# Altium PCB HLK-7621-ALL-KIT-V2.2.PcbDoc (part 1 of 2)
Units mm, origin at the board's own origin, x right, y up, seen from the top; angles counter-clockwise.
Board outline 140 x 100 mm, 2 copper layers (Top Layer, Bottom Layer); 118 components, 240 nets, 722 pads, 584 vias.
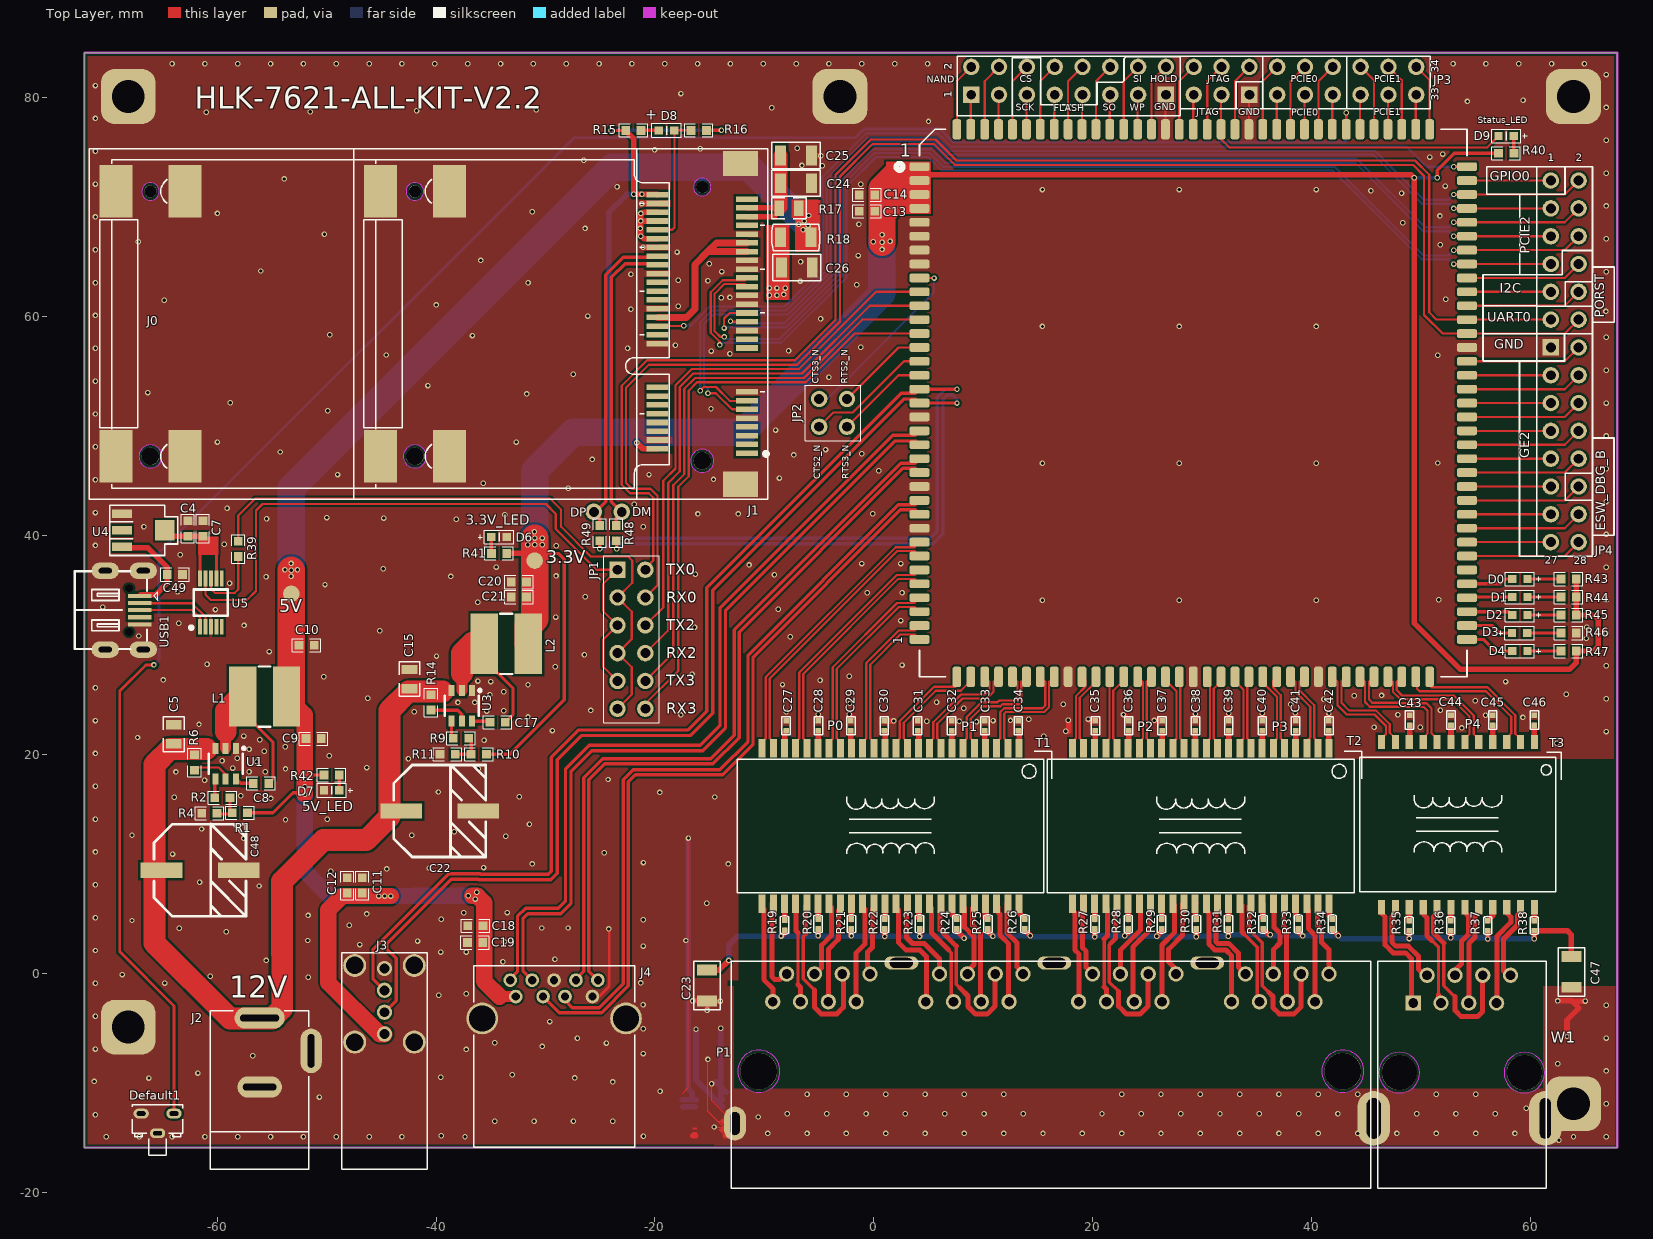
[diagram p0: Top Layer view]
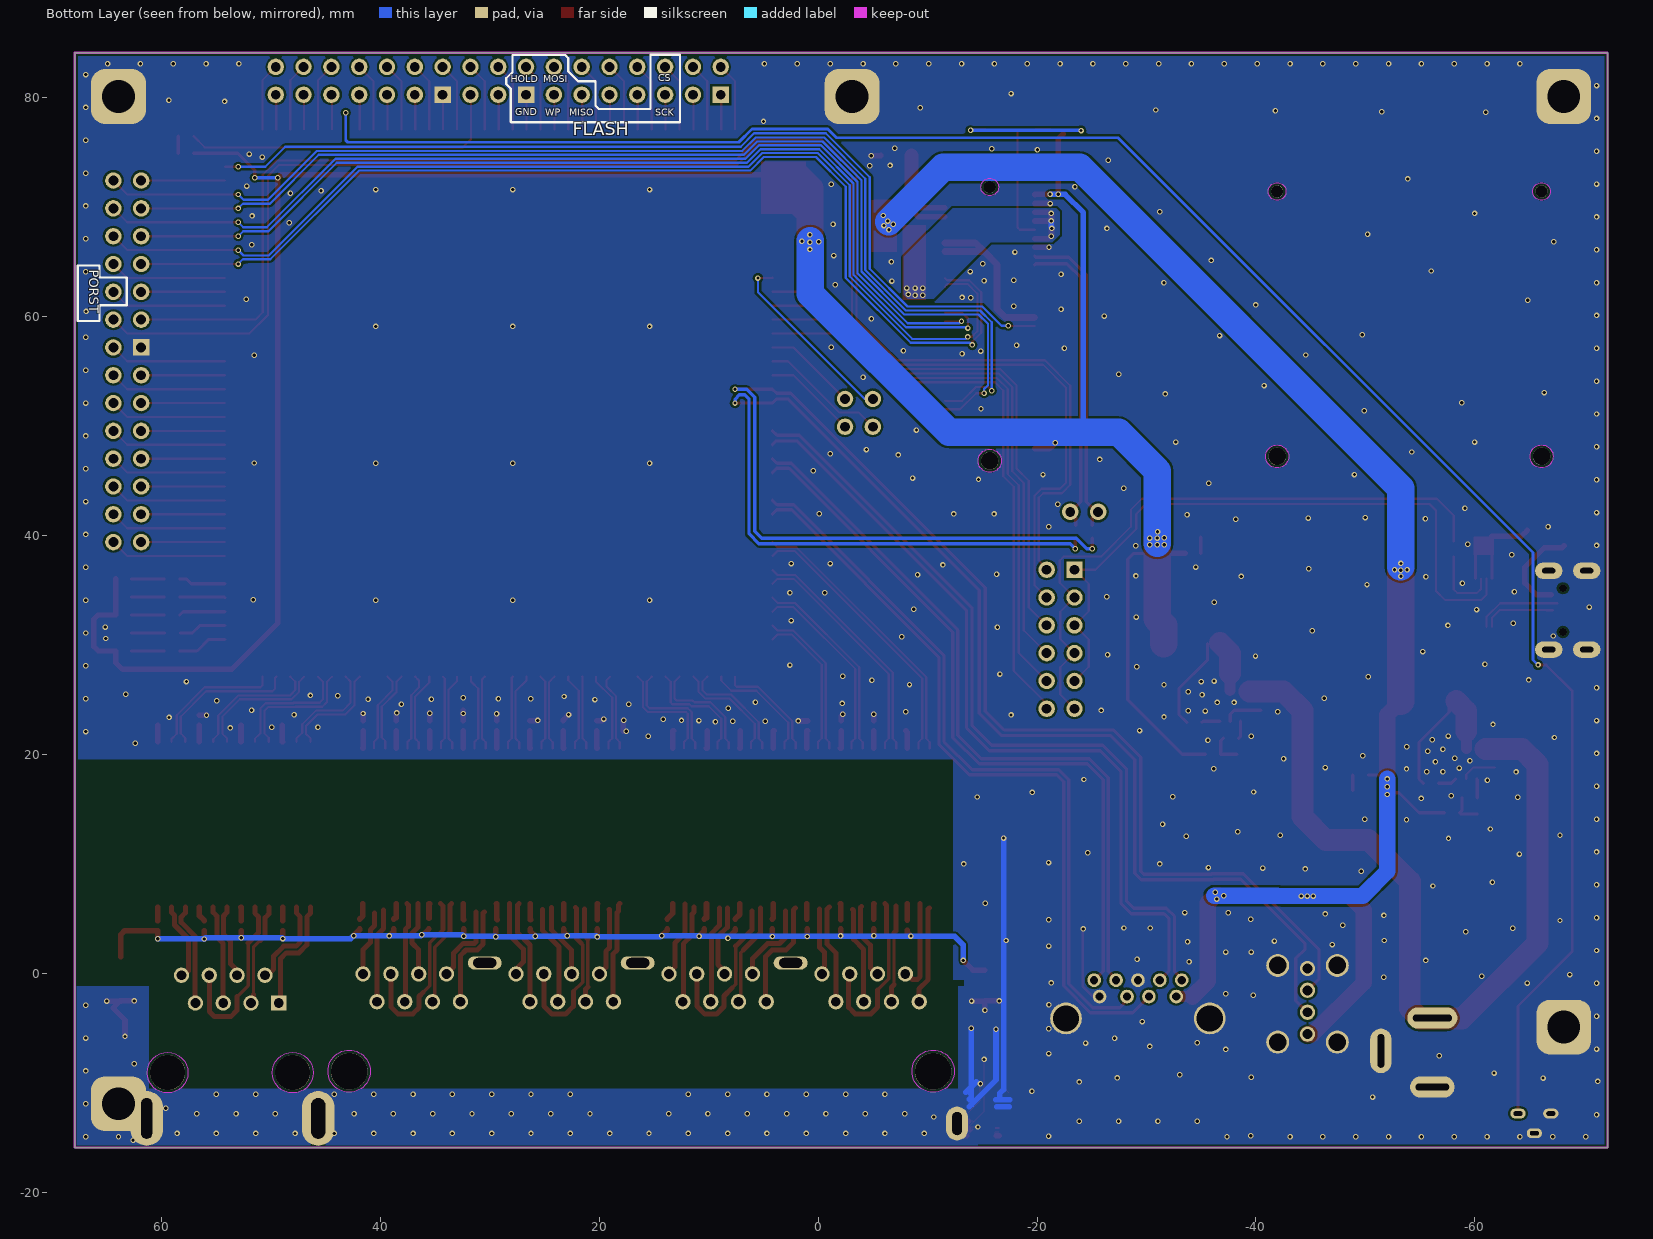
[diagram p1: Bottom Layer view, seen from below]

## Layer stack, top to bottom
Top Layer: signal copper 0.0356
Dielectric: core 0.32, FR-4, Dk 4.8
Bottom Layer: signal copper 0.0356

## Board outline
-72.108,-15.865 67.892,-15.865 67.892,84.135 -72.108,84.135

## Design rules (kind name [scope] priority, off if disabled: settings)
Clearance [OnLayer('Keep-Out Layer')] p1: gap=0.2
Clearance polygons [All] p2 off: gap=0.2
Clearance router [All] p3: gap=0.2
PlaneConnect [All] p1: planeconnectstyle=Direct reliefexpansion=0.508 reliefentries=4 reliefconductorwidth=0.254 reliefairgap=0.254
PolygonConnect [All] p1: connectstyle=Direct reliefconductorwidth=0.254 reliefentries=4 polygonreliefangle="90 Angle"
RoutingVias [All] p1: holewidth=0.3 width=0.5 viastyle="Through Hole" minholewidth=0.3 minwidth=0.5 maxholewidth=0.711 maxwidth=1.27
SilkscreenOverComponentPads [IsPad] p1: minsilkscreentomaskgap=0.254
SolderMaskExpansion [All] p1: expansion=0.05
TestPointUsage [All] p1: valid=0 allowmultiple=FALSE
Testpoint [(IsPad And (OnTopLayer Or OnBottomLayer))] p1: side=3 testpointundercomponent=TRUE minsize=1.016 maxsize=2.54 preferedsize=1.524 minholesize=0 maxholesize=1.016 preferedholesize=0.813 testpointgrid=0.025 style=297 order=0123456789
Width [All] p1: maxlimit=2.54 minlimit=0.152 preferedwidth=0.254
22 further rules are at their usual default settings.

## Components (designator, comment, footprint, x,y, rotation, side; value= is the part's Value field where it differs from the comment)
1 "7621" HLK-7621 4.162,73.725 r0 top locked
C4 "10uF" 0603 -62.662,40.68 r90 top
C5 "10uF/25V" L0805 -63.957,21.895 r90 top
C7 "0.1uF" 0603 -61.29,40.68 r90 top
C8 "1uF/25V" 0603 -55.982,17.399 r180 top
C9 "22uf" 0603 -51.181,21.488 r0 top
C10 "22uF" 0603 -51.816,30.023 r0 top
C11 "22uF" 0603 -46.736,8.077 r90 top
C12 "0.1uF" 0603 -48.108,8.077 r90 top
C13 "0.1uF" 0603 -0.635,69.647 r180 top
C14 "22uF" 0603 -0.635,71.145 r180 top
C15 "10uF/25V" L0805 -42.418,26.924 r90 top
C17 "1uF/25V" 0603 -34.366,22.987 r180 top
C18 "22uF" 0603 -36.398,4.394 r180 top
C19 "0.1uF" 0603 -36.424,2.87 r180 top
C20 "22uF" 0603 -32.436,35.789 r180 top
C21 "22uf" 0603 -32.436,34.417 r180 top
C22 "220UF/35V" CAP_SMT_8*10.5 -43.18,14.884 r90 top
C23 "1nF" C1206 -15.243,-1.06 r270 top
C24 "10uF" C1206 -7.124,72.215 r0 top
C25 "10uF" C1206 -7.124,74.755 r0 top
C26 "10uF" C1206 -7.038,64.526 r0 top
C27 "0.1uF" C0402 -8.018,22.665 r270 top
C28 "0.1uF" C0402 -5.08,22.665 r270 top
C29 "0.1uF" C0402 -2.108,22.665 r270 top
C30 "0.1uF" C0402 0.94,22.665 r270 top
C31 "0.1uF" C0402 3.988,22.665 r270 top
C32 "0.1uF" C0402 7.087,22.665 r270 top
C33 "0.1uF" C0402 10.135,22.665 r270 top
C34 "0.1uF" C0402 13.183,22.665 r270 top
C35 "0.1uF" C0402 20.218,22.665 r270 top
C36 "0.1uF" C0402 23.266,22.665 r270 top
C37 "0.1uF" C0402 26.314,22.665 r270 top
C38 "0.1uF" C0402 29.362,22.665 r270 top
C39 "0.1uF" C0402 32.41,22.665 r270 top
C40 "0.1uF" C0402 35.458,22.665 r270 top
C41 "0.1uF" C0402 38.506,22.665 r270 top
C42 "0.1uF" C0402 41.554,22.665 r270 top
C43 "0.1uF" C0402 48.92,23.173 r270 top
C44 "0.1uF" C0402 52.705,23.173 r270 top
C45 "0.1uF" C0402 56.515,23.173 r270 top
C46 "0.1uF" C0402 60.325,23.173 r270 top
C47 "1nF" C1206 63.703,0.178 r270 top
C48 "220UF/35v" CAP_SMT_8*10.5 -65.075,9.474 r90 top
C49 "10uF" 0603 -63.856,36.474 r180 top
D0 "P0_LED" 0603LED#1 59.69,36.068 r180 top
D1 "P1_LED" 0603LED#1 59.69,34.423 r180 top
D2 "P2_LED" 0603LED#1 59.69,32.779 r180 top
D3 "P3_LED" 0603LED#1 58.268,31.134 r0 top
D4 "P4_LED" 0603LED#1 59.69,29.489 r180 top
D6 "3.3V_LED" 0603LED#2 -34.217,39.853 r180 top (schematic designator D3)
D7 "5V_LED" 0603LED#2 -49.555,16.815 r0 top (schematic designator D4)
D8 "LED" 0603LED#3 -18.923,76.987 r180 top (schematic designator D2)
D9 "LED" 0603LED#2 57.722,76.579 r0 top (schematic designator D2)
Default1 "SW-PB" K5 -65.43,-14.554 r270 top
J1 "" CONSG/54/MINICARD/AS0B22-S68-7F/HALF/FUL -15.683,59.362 r90 top locked
J2 "PWR2.5" CON\DC-JACK\4.7 -56.108,-4.032 r90 top
J3 "" USB/4P/P2.0/DIP/R/F/SUA-110VB-B2N -44.707,-5.502 r270 top locked
J4 "USB3.0" USB3.0/9P/DIP/MAINSUPER -32.718,-2.073 r0 top locked
JP1 "" HDR2X6 -23.421,36.916 r270 top
JP2 "" HDR2X2 -2.466,49.972 r90 top
JP3 "" HDR2X17#1 8.887,80.3 r0 top
JP4 "2" HDR2X17#2 61.821,72.455 r270 top
L1 "6.8uH" "4.7uH SMD,5.8x5.2x4.5mm" -55.651,25.324 r0 top
L2 "6.8uH" "4.7uH SMD,5.8x5.2x4.5mm" -33.579,30.15 r0 top
P1 "Component_2" PHJ8X4_N -10.516,-8.89 r180 top locked
R1 "10.5K/1%" 0603 -57.912,14.707 r180 top
R2 "1K/1%" 0603 -59.512,16.078 r180 top
R4 "2K/1%" 0603 -60.706,14.681 r0 top
R6 "100K" 0603 -62.052,19.304 r90 top
R9 "1K" 0603 -37.719,21.514 r180 top
R10 "6.2K/1%" 0603 -36.093,20.066 r180 top
R11 "2K/1%" 0603 -38.938,20.066 r0 top
R14 "100K" 0603 -40.462,24.79 r90 top
R15 "330R" 0603 -21.971,77.038 r180 top
R16 "4.7K" 0603 -16.002,77.038 r180 top
R17 "0R" L0805 -7.759,69.929 r0 top
R18 "0R" R1206 -7.143,67.269 r180 top
R19 "75R" R0402 -8.166,4.462 r90 top
R20 "75R" R0402 -5.108,4.557 r90 top
R21 "75R" R0402 -2.06,4.557 r90 top
R22 "75R" R0402 0.988,4.557 r90 top
R23 "75R" R0402 4.163,4.557 r90 top
R24 "75R" R0402 7.567,4.557 r90 top
R25 "75R" R0402 10.411,4.557 r90 top
R26 "75R" R0402 13.79,4.557 r90 top
R27 "75R" R0402 20.175,4.557 r90 top
R28 "75R" R0402 23.223,4.557 r90 top
R29 "75R" R0402 26.271,4.557 r90 top
R30 "75R" R0402 29.446,4.557 r90 top
R31 "75R" R0402 32.367,4.557 r90 top
R32 "75R" R0402 35.542,4.557 r90 top
R33 "75R" R0402 38.758,4.557 r90 top
R34 "75R" R0402 41.857,4.557 r90 top
R35 "75R" R0402 48.877,4.404 r90 top
R36 "75R" R0402 52.687,4.404 r90 top
R37 "75R" R0402 56.055,4.404 r90 top
R38 "75R" R0402 60.307,4.404 r90 top
R39 "4.7K" 0603 -58.064,38.811 r90 top
R40 "1K" 0603 57.745,74.955 r0 top
R41 "2K" 0603 -34.228,38.405 r180 top
R42 "3K" 0603 -49.53,18.161 r0 top
R43 "1K" 0603 63.449,36.068 r180 top
R44 "1K" 0603 63.449,34.423 r180 top
R45 "1K" 0603 63.449,32.779 r180 top
R46 "1K" 0603 63.449,31.134 r180 top
R47 "1K" 0603 63.449,29.489 r180 top
R48 "NC" 0603 -23.546,40.259 r270 top (schematic designator R41)
R49 "NC" 0603 -25.044,40.259 r270 top (schematic designator R41)
T1 "HN4824CG" TRANSFORMER/48P/SMD/GS5014LF 1.524,13.513 r180 top locked
T2 "HN4824CG" TRANSFORMER/48P/SMD/GS5014LF 29.845,13.513 r180 top locked
T3 "HN2409CG" TRANSFORMER/24P/SMD/HN2429CG 53.34,13.64 r180 top
U1 "MP1470" MP1470 -59.207,19.202 r180 top
U3 "MP1470" MP1470 -37.643,24.486 r180 top
U4 "AMS1117-3.3" 1117 -68.758,42.037 r270 top
U5 "CH340E" MSOP-10 -60.554,33.909 r0 top
USB1 "USB1" USB-MICRO_D -70.206,33.223 r270 top
W1 "Component_3" PCBComponent_1 59.411,-9.015 r0 top

## Footprints (in the part's own frame and the unit in brackets; to place one, negate y for a bottom-side part, rotate by r counter-clockwise, add the part's x,y. Pads: shape width x height; smd on the part's side, far side on the other; paste and mask are expansions set on the pad)
"4.7uH SMD,5.8x5.2x4.5mm" [mm] "SMD,5.8x5.2x4.5mm"
  rect 2.5x5.5 smd: 1(-2,0) 2(2,0)
  silkscreen extent -0.55,-2.75 0.55,2.75
0603 [mm]
  rect 0.8x0.8 smd: 1(-0.7,0) 2(0.7,0)
  silkscreen extent -1.3,-0.6 1.3,0.6
0603LED#1 [mil] "0603贴片LED"
  rect 30x30 smd: 1(0,0) 2(55,0)
  silkscreen extent -48,-25 80,25
0603LED#2 [mil]
  rect 30x30 smd: 1(28.49,-1.91) 2(-26.51,-1.91)
  silkscreen extent -52,-27 76,23
0603LED#3 [mil]
  rect 30x30 smd: 1(-26.51,-1.91) 2(28.49,-1.91)
  silkscreen extent -52,-27 53,23
1117 [mm]
  rect 1.9x1.8 smd: 0(1.52,3.97)
  rect 0.75x1.8 smd: 1(0.02,0.07) 2(1.52,0.07) 3(3.02,0.07)
  silkscreen extent -0.78,-1.03 3.82,5.17, body extent -0.73,0.14 3.77,4.14, height 1.5
C0402 [mil]
  rect 20x20 smd: 1(-18,0) 2(18,0)
  silkscreen extent -33,-15 33,15
C1206 [mm]
  rect 1x1.8 smd: 1(-1.4,0) 2(1.4,0)
  silkscreen extent -2.2,-1.2 2.2,1.2
CAP_SMT_8*10.5 [mm]
  rect 1.4x3.8 smd: 1(0,0) 2(0,-7.051)
  silkscreen extent -4.22,-7.71 4.21,0.69
CON\DC-JACK\4.7 [mm]
  oval 1.956x4.572 hole 0.6 slot 3.556 at 90 deg: 1(0,0)
  oval 1.956x4.064 hole 0.6 slot 3.048 at 90 deg: 2(-6.3,0)
  oval 4.064x1.956 hole 0.6 slot 3.048 at 0 deg: 3(-3,-4.7)
  silkscreen extent -13.8,-4.5 0.65,4.5
CONSG/54/MINICARD/AS0B22-S68-7F/HALF/FUL [mm]
  rect 0.508x2 smd: 1(-11.8,-4.1) 2(-11.4,4.1) 3(-11,-4.1) 4(-10.6,4.1) 5(-10.2,-4.1) 6(-9.8,4.1) 7(-9.4,-4.1) 8(-9,4.1) 9(-8.6,-4.1) 10(-8.2,4.1) 11(-7.8,-4.1) 12(-7.4,4.1) 13(-7,-4.1) 14(-6.6,4.1) 15(-6.2,-4.1) 16(-5.8,4.1) 17(-2.2,-4.1) 18(-1.8,4.1) 19(-1.4,-4.1) 20(-1,4.1) 21(-0.6,-4.1) 22(-0.2,4.1) 23(0.2,-4.1) 24(0.6,4.1) 25(1,-4.1) 26(1.4,4.1) 27(1.8,-4.1) 28(2.2,4.1) 29(2.6,-4.1) 30(3,4.1) 31(3.4,-4.1) 32(3.8,4.1) 33(4.2,-4.1) 34(4.6,4.1) 35(5,-4.1) 36(5.4,4.1) 37(5.8,-4.1) 38(6.2,4.1) 39(6.6,-4.1) 40(7,4.1) 41(7.4,-4.1) 42(7.8,4.1) 43(8.2,-4.1) 44(8.6,4.1) 45(9,-4.1) 46(9.4,4.1) 47(9.8,-4.1) 48(10.2,4.1) 49(10.6,-4.1) 50(11,4.1) 51(11.4,-4.1) 52(11.8,4.1)
  round 1.6 hole 1.6 unplated: 53(-12.5,0) 61(-12.1,26.25) 67(-12.1,50.4)
  round 1.1 hole 1.1 unplated: 54(12.5,0) 62(12.1,26.25) 68(12.1,50.4)
  rect 2.3x3.2 smd: 55(-14.65,-3.5) 56(14.65,-3.5)
  rect 4.8x3 smd: 57(-12.1,23.1) 58(12.1,23.1) 59(-12.1,29.4) 60(12.1,29.4) 63(-12.1,47.25) 64(12.1,47.25) 65(-12.1,53.55) 66(12.1,53.55)
  Keep-Out Layer pour cut-out: 13.304,0 13.243,0.308 13.069,0.569 12.808,0.743 12.5,0.804 12.5,0.804 12.192,0.743 11.931,0.569 11.757,0.308 11.696,0 11.696,0 11.757,-0.308 11.931,-0.569 12.192,-0.743 12.5,-0.804 12.5,-0.804 12.808,-0.743 13.069,-0.569 13.243,-0.308 13.304,0
  Keep-Out Layer pour cut-out: -11.446,0 -11.526,0.403 -11.755,0.745 -12.097,0.974 -12.5,1.054 -12.5,1.054 -12.903,0.974 -13.245,0.745 -13.474,0.403 -13.554,0 -13.554,0 -13.474,-0.403 -13.245,-0.745 -12.903,-0.974 -12.5,-1.054 -12.5,-1.054 -12.097,-0.974 -11.755,-0.745 -11.526,-0.403 -11.446,0
  Keep-Out Layer pour cut-out: 12.904,26.25 12.843,26.558 12.669,26.819 12.408,26.993 12.1,27.054 12.1,27.054 11.792,26.993 11.531,26.819 11.357,26.558 11.296,26.25 11.296,26.25 11.357,25.942 11.531,25.681 11.792,25.507 12.1,25.446 12.1,25.446 12.408,25.507 12.669,25.681 12.843,25.942 12.904,26.25
  Keep-Out Layer pour cut-out: -11.046,26.25 -11.126,26.653 -11.355,26.995 -11.697,27.224 -12.1,27.304 -12.1,27.304 -12.503,27.224 -12.845,26.995 -13.074,26.653 -13.154,26.25 -13.154,26.25 -13.074,25.847 -12.845,25.505 -12.503,25.276 -12.1,25.196 -12.1,25.196 -11.697,25.276 -11.355,25.505 -11.126,25.847 -11.046,26.25
  Keep-Out Layer pour cut-out: 12.904,50.4 12.843,50.708 12.669,50.969 12.408,51.143 12.1,51.204 12.1,51.204 11.792,51.143 11.531,50.969 11.357,50.708 11.296,50.4 11.296,50.4 11.357,50.092 11.531,49.831 11.792,49.657 12.1,49.596 12.1,49.596 12.408,49.657 12.669,49.831 12.843,50.092 12.904,50.4
  Keep-Out Layer pour cut-out: -11.046,50.4 -11.126,50.803 -11.355,51.145 -11.697,51.374 -12.1,51.454 -12.1,51.454 -12.503,51.374 -12.845,51.145 -13.074,50.803 -13.154,50.4 -13.154,50.4 -13.074,49.997 -12.845,49.655 -12.503,49.426 -12.1,49.346 -12.1,49.346 -11.697,49.426 -11.355,49.655 -11.126,49.997 -11.046,50.4
  silkscreen extent -16,-6.16 16,56
HDR2X2 [mm] "Connector; Header; 2x2 Position"
  round 1.5 hole 0.9: 1(0,0) 2(0,2.54) 3(2.54,0) 4(2.54,2.54)
  silkscreen extent -1.27,-1.27 3.81,3.81
HDR2X6 [mm] "Connector; Header; 6x2 Position"
  rect 1.5x1.5 hole 0.9: 1(0,0)
  round 1.5 hole 0.9: 2(0,2.54) 3(2.54,0) 4(2.54,2.54) 5(5.08,0) 6(5.08,2.54) 7(7.62,0) 8(7.62,2.54) 9(10.16,0) 10(10.16,2.54) 11(12.7,0) 12(12.7,2.54)
  silkscreen extent -1.27,-1.27 13.97,3.81
HDR2X17#1 [mm] "Connector; Header; 17x2 Position"
  rect 1.5x1.5 hole 0.9: 1(0,0) 15(17.78,0) 21(25.4,0)
  round 1.5 hole 0.9: 2(0,2.54) 3(2.54,0) 4(2.54,2.54) 5(5.08,0) 6(5.08,2.54) 7(7.62,0) 8(7.62,2.54) 9(10.16,0) 10(10.16,2.54) 11(12.7,0) 12(12.7,2.54) 13(15.24,0) 14(15.24,2.54) 16(17.78,2.54) 17(20.32,0) 18(20.32,2.54) 19(22.86,0) 20(22.86,2.54) 22(25.4,2.54) 23(27.94,0) 24(27.94,2.54) 25(30.48,0) 26(30.48,2.54) 27(33.02,0) 28(33.02,2.54) 29(35.56,0) 30(35.56,2.54) 31(38.1,0) 32(38.1,2.54) 33(40.64,0) 34(40.64,2.54)
  silkscreen extent -1.27,-1.27 41.91,3.52
HDR2X17#2 [mm] "Connector; Header; 17x2 Position"
  round 1.5 hole 0.9: 1(0,0) 2(0,2.54) 3(2.54,0) 4(2.54,2.54) 5(5.08,0) 6(5.08,2.54) 7(7.62,0) 8(7.62,2.54) 9(10.16,0) 10(10.16,2.54) 11(12.7,0) 12(12.7,2.54) 14(15.24,2.54) 15(17.78,0) 16(17.78,2.54) 17(20.32,0) 18(20.32,2.54) 19(22.86,0) 20(22.86,2.54) 21(25.4,0) 22(25.4,2.54) 23(27.94,0) 24(27.94,2.54) 25(30.48,0) 26(30.48,2.54) 27(33.02,0) 28(33.02,2.54)
  rect 1.5x1.5 hole 0.9: 13(15.24,0)
  silkscreen extent -1.27,-1.27 34.3,3.81
HLK-7621 [mm]
  rrect50% 1.85x0.8 smd: 1(0,0) 2(0,-1.27) 3(0,-2.54) 4(0,-3.81) 5(0,-5.08) 6(0,-6.35) 7(0,-7.62) 8(0,-8.89) 9(0,-10.16) 10(0,-11.43) 11(0,-12.7) 12(0,-13.97) 13(0,-15.24) 14(0,-16.51) 15(0,-17.78) 16(0,-19.05) 17(0,-20.32) 18(0,-21.59) 19(0,-22.86) 20(0,-24.13) 21(0,-25.4) 22(0,-26.67) 23(0,-27.94) 24(0,-29.21) 25(0,-30.48) 26(0,-31.75) 27(0,-33.02) 28(0,-34.29) 29(0,-35.56) 30(0,-36.83) 31(0,-38.1) 32(0,-39.37) 33(0,-40.64) 34(0,-41.91) 35(0,-43.18) 71(50,-43.18) 72(50,-41.91) 73(50,-40.64) 74(50,-39.37) 75(50,-38.1) 76(50,-36.83) 77(50,-35.56) 78(50,-34.29) 79(50,-33.02) 80(50,-31.75) 81(50,-30.48) 82(50,-29.21) 83(50,-27.94) 84(50,-26.67) 85(50,-25.4) 86(50,-24.13) 87(50,-22.86) 88(50,-21.59) 89(50,-20.32) 90(50,-19.05) 91(50,-17.78) 92(50,-16.51) 93(50,-15.24) 94(50,-13.97) 95(50,-12.7) 96(50,-11.43) 97(50,-10.16) 98(50,-8.89) 99(50,-7.62) 100(50,-6.35) 101(50,-5.08) 102(50,-3.81) 103(50,-2.54) 104(50,-1.27) 105(50,0)
  rrect50% 0.8x1.85 smd: 36(3.41,-46.59) 37(4.68,-46.59) 38(5.95,-46.59) 39(7.22,-46.59) 40(8.49,-46.59) 41(9.76,-46.59) 42(11.03,-46.59) 43(12.3,-46.59) 44(13.57,-46.59) 45(14.84,-46.59) 46(16.11,-46.59) 47(17.38,-46.59) 48(18.65,-46.59) 49(19.92,-46.59) 50(21.19,-46.59) 51(22.46,-46.59) 52(23.73,-46.59) 53(25,-46.59) 54(26.27,-46.59) 55(27.54,-46.59) 56(28.81,-46.59) 56(28.81,-46.59) 57(30.08,-46.59) 58(31.35,-46.59) 59(32.62,-46.59) 60(33.89,-46.59) 61(35.16,-46.59) 62(36.43,-46.59) 63(37.7,-46.59) 64(38.97,-46.59) 65(40.24,-46.59) 66(41.51,-46.59) 67(42.78,-46.59) 68(44.05,-46.59) 69(45.32,-46.59) 70(46.59,-46.59) 106(46.59,3.41) 107(45.32,3.41) 108(44.05,3.41) 109(42.78,3.41) 110(41.51,3.41) 111(40.24,3.41) 112(38.97,3.41) 113(37.7,3.41) 114(36.43,3.41) 115(35.16,3.41) 116(33.89,3.41) 117(32.62,3.41) 118(31.35,3.41) 119(30.08,3.41) 120(28.81,3.41) 121(27.54,3.41) 122(26.27,3.41) 123(25,3.41) 124(23.73,3.41) 125(22.46,3.41) 126(21.19,3.41) 127(19.92,3.41) 128(18.65,3.41) 129(17.38,3.41) 130(16.11,3.41) 131(14.84,3.41) 132(13.57,3.41) 133(12.3,3.41) 134(11.03,3.41) 135(9.76,3.41) 136(8.49,3.41) 137(7.22,3.41) 138(5.95,3.41) 139(4.68,3.41) 140(3.41,3.41)
  silkscreen extent -2.12,-46.59 50,3.41
K5 [mm]
  oval 0.9x1.4 hole 0.4 slot 0.8 at 90 deg: 1(-1.8,1.5) 2(-1.8,-1.5) 3(0,0)
  silkscreen extent -2.6,-2.3 2,2.3
L0805 [mil]
  rect 34x56 smd: 1(-34.45,0) 2(34.45,0)
  silkscreen extent -62,-38 62,38
MP1470 [mm]
  rect 0.55x1 smd: 1(-0.95,-1.4) 2(0,-1.4) 3(0.95,-1.4) 4(0.95,1.4) 5(0,1.4) 6(-0.95,1.4)
  silkscreen extent -1.78,-1.52 1.55,0.9
MSOP-10 [mm]
  rect 0.33x1.45 smd: 1(-1,-2.2) 2(-0.5,-2.2) 3(0,-2.2) 4(0.5,-2.2) 5(1,-2.2) 6(1,2.2) 7(0.5,2.2) 8(0,2.2) 9(-0.5,2.2) 10(-1,2.2)
  silkscreen extent -1.95,-2.44 1.53,1.2
PCBComponent_1 [mm]
  rect 1.4x1.4 / inner round 1.4 / far side rect 1.4x1.4 hole 0.9: 1(-10.16,6.35)
  round 1.4 hole 0.9: 2(-8.89,8.89) 3(-7.62,6.35) 4(-6.35,8.89) 5(-5.08,6.35) 6(-3.81,8.89) 7(-2.54,6.35) 8(-1.27,8.89)
  round 3.2 hole 3.2 unplated: 9(-11.43,0) 9(0,0)
  oval 3x5 hole 1 slot 3.7 at 90 deg: 10(1.905,-4.185)
  oval 3x5 hole 1.3 slot 3.7 at 90 deg: ""(-13.762,-4.185)
  Keep-Out Layer pour cut-out: -9.567,0 -9.603,0.363 -9.709,0.713 -9.881,1.035 -10.113,1.317 -10.395,1.549 -10.717,1.721 -11.067,1.827 -11.43,1.863 -11.793,1.827 -12.143,1.721 -12.465,1.549 -12.747,1.317 -12.979,1.035 -13.151,0.713 -13.257,0.363 -13.293,0 -13.257,-0.363 -13.151,-0.713 -12.979,-1.035 -12.747,-1.317 -12.465,-1.549 -12.143,-1.721 -11.793,-1.827 -11.43,-1.863 -11.067,-1.827 -10.717,-1.721 -10.395,-1.549 -10.113,-1.317 -9.881,-1.035 -9.709,-0.713 -9.603,-0.363
  Keep-Out Layer pour cut-out: 1.863,0 1.827,0.363 1.721,0.713 1.549,1.035 1.317,1.317 1.035,1.549 0.713,1.721 0.363,1.827 0,1.863 -0.363,1.827 -0.713,1.721 -1.035,1.549 -1.317,1.317 -1.549,1.035 -1.721,0.713 -1.827,0.363 -1.863,0 -1.827,-0.363 -1.721,-0.713 -1.549,-1.035 -1.317,-1.317 -1.035,-1.549 -0.713,-1.721 -0.363,-1.827 0,-1.863 0.363,-1.827 0.713,-1.721 1.035,-1.549 1.317,-1.317 1.549,-1.035 1.721,-0.713 1.827,-0.363
  silkscreen extent -13.41,-10.55 1.98,10.15
PHJ8X4_N [mil]
  round 55 hole 35: 1(-50,-250) 2(-100,-350) 3(-150,-250) 4(-200,-350) 5(-250,-250) 6(-300,-350) 7(-350,-250) 8(-400,-350) 9(-600,-250) 10(-650,-350) 11(-700,-250) 12(-750,-350) 13(-800,-250) 14(-850,-350) 15(-900,-250) 16(-950,-350) 17(-1150,-250) 18(-1200,-350) 19(-1250,-250) 20(-1300,-350) 21(-1350,-250) 22(-1400,-350) 23(-1450,-250) 24(-1500,-350) 25(-1700,-250) 26(-1750,-350) 27(-1800,-250) 28(-1850,-350) 29(-1900,-250) 30(-1950,-350) 31(-2000,-250) 32(-2050,-350)
  round 132 hole 132 unplated: 33(-2100,0) 34(0,0)
  Keep-Out Layer pour cut-out: -2024,0 -2029.79,29.08 -2046.26,53.74 -2070.92,70.21 -2100,76 -2100,76 -2129.08,70.21 -2153.74,53.74 -2170.21,29.08 -2176,0 -2176,0 -2170.21,-29.08 -2153.74,-53.74 -2129.08,-70.21 -2100,-76 -2100,-76 -2070.92,-70.21 -2046.26,-53.74 -2029.79,-29.08 -2024,0
  Keep-Out Layer pour cut-out: 76,0 70.21,29.08 53.74,53.74 29.08,70.21 0,76 0,76 -29.08,70.21 -53.74,53.74 -70.21,29.08 -76,0 -76,0 -70.21,-29.08 -53.74,-53.74 -29.08,-70.21 0,-76 0,-76 29.08,-70.21 53.74,-53.74 70.21,-29.08 76,0
  silkscreen extent -2200,-395 100,420
R0402 [mil]
  rect 20x20 smd: 1(-18,0) 2(18,0)
  silkscreen extent -33,-15 33,15
R1206 [mm]
  rect 1x1.8 smd: 1(-1.4,0) 2(1.4,0)
  silkscreen extent -2.2,-1.2 2.2,1.2
TRANSFORMER/24P/SMD/HN2429CG [mm]
  rect 0.66x1.3 smd: 1(-6.985,-7.55) 2(-5.715,-7.55) 3(-4.445,-7.55) 4(-3.175,-7.55) 5(-1.905,-7.55) 6(-0.635,-7.55) 7(0.635,-7.55) 8(1.905,-7.55) 9(3.175,-7.55) 10(4.445,-7.55) 11(5.715,-7.55) 12(6.985,-7.55) 13(6.985,7.55) 14(5.715,7.55) 15(4.445,7.55) 16(3.175,7.55) 17(1.905,7.55) 18(0.635,7.55) 19(-0.635,7.55) 20(-1.905,7.55) 21(-3.175,7.55) 22(-4.445,7.55) 23(-5.715,7.55) 24(-6.985,7.55)
  silkscreen extent -9.42,-6.62 8.95,6.15
TRANSFORMER/48P/SMD/GS5014LF [mm]
  rect 0.64x1.7 smd: 1(-11.73,-7.1) 2(-10.71,-7.1) 3(-9.69,-7.1) 4(-8.67,-7.1) 5(-7.65,-7.1) 6(-6.63,-7.1) 7(-5.61,-7.1) 8(-4.59,-7.1) 9(-3.57,-7.1) 10(-2.55,-7.1) 11(-1.53,-7.1) 12(-0.51,-7.1) 13(0.51,-7.1) 14(1.53,-7.1) 15(2.55,-7.1) 16(3.57,-7.1) 17(4.59,-7.1) 18(5.61,-7.1) 19(6.63,-7.1) 20(7.65,-7.1) 21(8.67,-7.1) 22(9.69,-7.1) 23(10.71,-7.1) 24(11.73,-7.1) 25(11.73,7.1) 26(10.71,7.1) 27(9.69,7.1) 28(8.67,7.1) 29(7.65,7.1) 30(6.63,7.1) 31(5.61,7.1) 32(4.59,7.1) 33(3.57,7.1) 34(2.55,7.1) 35(1.53,7.1) 36(0.51,7.1) 37(-0.51,7.1) 38(-1.53,7.1) 39(-2.55,7.1) 40(-3.57,7.1) 41(-4.59,7.1) 42(-5.61,7.1) 43(-6.63,7.1) 44(-7.65,7.1) 45(-8.67,7.1) 46(-9.69,7.1) 47(-10.71,7.1) 48(-11.73,7.1)
  silkscreen extent -14.69,-6.83 14,6.1
USB3.0/9P/DIP/MAINSUPER [mm]
  round 1.25 hole 0.75: 1(0,0) 2(2.5,0) 3(4.5,0) 4(7,0) 5(7.5,1.5) 6(5.5,1.5) 7(3.5,1.5) 8(1.5,1.5) 9(-0.5,1.5)
  round 2.9 hole 2.4: 10(-3.07,-2) 11(10.07,-2)
  silkscreen extent -3.85,-13.78 10.85,2.82
USB-MICRO_D [mm] "micro型USB ，6.7*7.5*2.5mm"
  round 0 hole 0.7 unplated: 0(-2,2.17) 0(2,2.17)
  rect 0.381x2.15 smd: 1(-1.3,3.16) 2(-0.65,3.16) 3(0,3.16) 4(0.65,3.16) 5(1.3,3.16)
  oval 1.5x2.5 hole 0.5 slot 1.2 at 90 deg: 6(3.6,3.47) 7(3.6,0) 8(-3.6,0) 9(-3.6,3.47)
  silkscreen extent -3.56,-2.79 3.56,4.81
USB/4P/P2.0/DIP/R/F/SUA-110VB-B2N [mm]
  round 1.4 hole 0.9: 1(0,0) 2(-2,0) 3(-4,0) 4(-6,0)
  round 2.1 hole 1.6: 5(0.73,2.72) 6(0.73,-2.72) 7(-6.27,2.72) 8(-6.27,-2.72)
  silkscreen extent -7.44,-3.9 12.33,3.9

## Part data
C4 C7 C8 C9 C10 C11 C12 C13 C14 C15 C17 C18 C19 C20 C21 C23 C24 C25 C26 C27 C28 C29 C30 C31 C32 C33 C34 C35 C36 C37 C38 C39 C40 C41 C42 C43 C44 C45 C46 C47 C49: library part CAP, "Capacitor"
C5 C22 C48: library part "CAPACITOR POL", "Capacitor"
D0 D1 D2 D3 D4 D6 D7: library part LED
Default1: "Switch"
J1 JP1 U4: library part Component_1
J2: "Low Voltage Power Supply Connector"
J3 JP2 JP3: library part 2
J4: library part USB3.0/9P/DIP/MAINSUPER
L1 L2: library part INDUCTOR1
R1 R2 R4 R6 R9 R10 R11 R14 R15 R16 R17 R18 R19 R20 R21 R22 R23 R24 R25 R26 R27 R28 R29 R30 R31 R32 R33 R34 R35 R36 R37 R38 R39 R40 R41 R42 R43 R44 R45 R46 R47 R48 R49: library part Res2, "Resistor"
T1 T2 T3: library part TRANSFORMER/24P/SMD/HN2429CG
USB1: library part USB-B

## Free pads (board coordinates)
  round 1.5 smd: 0(-53.213,34.722) 1(-30.988,37.744)
  rrect50% 5x5 hole 3: 1(-68.108,-4.865) 1(-68.108,80.135) 1(-3.108,80.135) 1(63.892,-11.865) 1(63.892,80.135)
  oval 2x3.1 hole 0.9 slot 2.1 at 90 deg: ""(-12.698,-13.667)
  oval 3.1x1.2 hole 0.9 slot 2.1 at 0 deg: ""(2.5,1.001) ""(16.47,1.001) ""(30.44,1.001)

## Via types
v1: diameter 0.5, hole 0.3, Top Layer to Bottom Layer, tented both sides, 582 vias
v2: diameter 1.5, hole 0.9, Top Layer to Bottom Layer, tented both sides, 2 vias

## Nets (pads, with @x,y where several pads share a name; then routed paths per layer and width w, separated by ;. In a path a pad name is that pad's centre, name@x,y a point inside that pad or via, vN(x,y) a via of type N, cw(c..) or ccw(c..) an arc to the next point about the centre after c; other vN are vias at no path point)
3.3V: 1.1 1.2 1.3 1.4 C13.1 C14.1 C20.1 C21.1 J1.2 J1.52 L2.2 pad.1@-30.988,37.744 R10.1 R15.2 R16.1 R40.1 R41.1 R43.1 R44.1 R45.1 R47.1 | length 276
  Top Layer w0.3: R10.1@-35.393,20.066 -33.249,20.066 -28.296,25.019 -28.296,37.871 -28.829,38.405 pad.1@-31.09,38.405 ; 1.1@4.801,73.66 4.801,72.695 5.105,73 ; v1(51.448,72.707) 51.459,72.719 51.459,73.407 53.007,74.955 R40.1@57.045,74.955
  Top Layer w0.305: v1(-24.023,77.025) -22.508,77.025 R15.2@-22.475,76.992 ; R16.1@-15.302,77.045 v1(-13.929,77.045)
  Top Layer w0.5: R41.1@-33.528,38.405 -31.09,38.405 -30.988,38.506 ; 2.845,73.076 2.921,73 49.047,73 v1(49.34,72.707) 49.34,32.042 53.569,27.813 63.525,27.813 64.149,28.437 R47.1@64.149,29.489 65.735,29.489 66.142,29.896 66.142,32.41 65.773,32.779 R45.1@64.149,32.779 R44.1@64.149,34.423 R43.1@64.149,36.068
  Top Layer w0.508: R15.2@-22.377,76.708 -21.932,76.262 v1(-21.932,71.199) v1(-21.195,71.199) -19.783,71.199 J1.52@-19.783,71.162 ; v1(-21.666,48.514) -21.115,47.962 J1.2@-19.783,47.962
  Top Layer w0.6: 0.737,69.825 0.827,69.915 1.157,69.915 1.4@4.162,69.915 ; 0.737,71.73 1.281,71.185 1.3@4.162,71.185 1.3@4.183,71.206 ; 1.2@4.162,72.455 1.2@4.166,72.451
  Top Layer w2.5: L2.2@-31.579,30.15 -31.579,31.814 -30.981,32.412 -30.981,36.974 -30.988,36.981 -30.988,38.506 v1(-30.988,39.192) v1(-30.988,39.802) ; v1(0.737,66.827) v1(0.737,67.513) 0.737,69.494 ; 1.586,70.344 1.157,69.915 0.737,69.494 ; 3.404,72.873 1.88,72.873 0.737,71.73 0.737,69.825 0.737,69.494
  Bottom Layer w0.3: v1(49.34,72.707) v1(51.448,72.707)
  Bottom Layer w0.305: v1@-23.82,77.038 v1@-13.929,77.038
  Bottom Layer w0.508: -24.232,49.505 -24.232,69.532 -22.565,71.199 v1(-21.932,71.199) v1(-21.195,71.199)
  Bottom Layer w2.5: v1@-30.988,39.319 v1(-30.988,39.802) -30.988,45.931 -27.465,49.454 -11.963,49.454 0.711,62.128 v1@0.711,66.954
  other v1: -31.623,39.192 -30.302,39.192 -30.302,39.802 -31.623,39.827 -31.013,40.386 0.737,66.167 -0.076,66.878 1.473,66.904
3.3V_AUX0: J1.24 J1.39 J1.41 | length 17
  Top Layer w0.635: J1.24@-19.783,59.962 -17.109,59.962 -16.33,60.742 -16.33,64.811 -15.178,65.962 ; J1.39@-11.583,65.962 -15.178,65.962 ; J1.41@-11.583,66.762 -14.378,66.762 -15.178,65.962
5V: C49.2 U4.3 USB1.1 | length 8.7
  Top Layer w0.5: U4.3@-68.154,39.119 -67.974,38.938 -66.345,38.938 -64.556,37.149 C49.2@-64.556,36.474 -64.556,35.698 -65.634,34.62 USB1.1@-66.949,34.62
5VD: C9.1 C10.1 C11.1 C12.1 C18.1 C19.1 J3.1 J4.1 L1.2 pad.0 R1.1 R17.2 R18.1 R42.1 | length 156.5
  Top Layer w0.3: R1.1@-57.212,14.707 -54.889,14.707 -53.061,16.535 -52.629,16.535 ; v1(-51.994,17.805) -51.638,18.161 R42.1@-50.23,18.161
  Top Layer w0.508: -6.031,69.929 -6.012,69.961 -5.644,70.329 -5.396,70.081 -5.396,69.929 -5.701,69.624 -5.701,69.446
  Top Layer w1: -34.199,-2.073 J4.1@-32.718,-2.073
  Top Layer w1.27: R17.2@-6.884,69.929 -6.031,69.929
  Top Layer w1.5: L1.2@-53.652,25.324 -51.994,23.666 v1(-51.994,17.805) v1(-51.994,17.094) v1(-51.994,16.383) ; J3.1@-44.707,-5.502 -45.138,-5.502 -49.835,-0.805 -49.835,5.842 -48.565,7.112 v1(-45.237,7.112) v1(-44.679,7.112) v1(-44.145,7.112) ; -36.703,7.137 -36.246,7.137 -35.608,6.5 -35.608,-0.663 -34.199,-2.073
  Top Layer w2.5: L1.2@-53.213,24.885 v1(-53.213,36.855)
  Bottom Layer w0.508: J3.1@-44.787,-5.421 J3.1@-44.707,-5.502
  Bottom Layer w1.5: v1(-51.994,17.805) v1(-51.994,17.094) v1(-51.994,16.383) -51.994,9.373 -49.733,7.112 v1(-45.237,7.112) v1(-44.679,7.112) v1(-44.145,7.112) -42.248,7.112 ; -41.958,7.148 -36.17,7.148
  Bottom Layer w2.5: -53.213,37.16 -53.213,44.361 -23.904,73.67 -11.415,73.67 v1@-6.452,68.707
  other v1: -36.424,6.833 -37.059,7.137 -36.271,7.468 -53.238,36.322 -53.797,36.906 -52.654,36.906 -53.238,37.49 -6.477,67.97 -6.02,68.351 -6.858,68.478 -6.375,68.758 -5.944,69.266
5VD_E_G: C26.1 J1.42 J1.46 J1.48 R18.2 | length 7.3
  Top Layer w0.102: v1@-21.322,68.76 v1@-21.297,68.735
  Top Layer w0.508: J1.42@-19.783,67.162 -21.037,67.162 -21.322,67.447 -21.322,68.202 -21.322,68.76 v1@-21.322,68.762 ; J1.46@-19.783,68.762 v1@-21.322,68.762 ; J1.48@-19.783,69.562 -21.037,69.562 -21.322,69.278 v1@-21.322,68.762
  Bottom Layer w0.508: v1@-21.322,68.202 -21.31,68.202 -21.31,68.735 v1@-21.297,68.735
  other v1: -9.576,61.976 -8.865,61.976 -8.23,62.052 -9.576,62.636 -8.858,62.635 -8.108,62.635 -21.313,67.371 -21.339,68.082 -21.313,68.768 -21.313,69.454
12V: C5.1 C15.1 C22.1 C48.1 J2.1 R6.2 R14.2 U1.3 U3.3 | length 75.6
  Top Layer w2: -60.96,20.549 -64.287,20.549 -65.71,19.126 -65.71,2.813 -58.832,-4.064 -54.966,-4.064 -54.047,-3.145 -54.047,1.83 -54.051,1.835 -54.051,8.458 -50.292,12.217 -46.38,12.217 C22.1@-44.247,14.351 ; C22.1@-44.247,14.376 -44.247,24.054 -42.52,25.781 -39.395,25.781
CTS2_N: 1.15 JP2.2 | length 11.6
  Top Layer w0.203: JP2.2@-5.006,49.972 -3.711,51.267 -1.933,51.267 2.745,55.945 1.15@4.162,55.945
CTS3_N: 1.9 JP2.4 | length 17.2
  Top Layer w0.203: 1.9@4.156,63.571 1.9@4.162,63.565 4.176,63.551 v1(5.486,63.551)
  Bottom Layer w0.203: JP2.4@-5.006,52.512 -4.257,52.512 5.486,62.255 v1(5.486,63.551)
D+: U5.1 USB1.3 | length 7.4
  Top Layer w0.203: USB1.3@-67.102,33.205 USB1.3@-66.7,33.205 ; USB1.3@-67.012,33.223 USB1.3@-66.7,33.223 ; USB1.3@-66.827,33.205 USB1.3@-66.675,33.205 ; USB1.3@-66.548,33.205 USB1.3@-66.53,33.223 ; U5.1@-61.554,31.709 -61.554,32.535 -62.241,33.223 USB1.3@-66.675,33.223 ; USB1.3@-66.675,33.223 -66.827,33.223 USB1.3@-66.675,33.223
D-: U5.2 USB1.2 | length 8.2
  Top Layer w0.203: USB1.2@-67.537,33.858 USB1.2@-67.255,33.858 ; USB1.2@-67.102,33.855 -67.08,33.833 USB1.2@-67.055,33.858 ; U5.2@-61.054,31.709 -61.054,32.606 -62.306,33.858 USB1.2@-67.229,33.858 ; USB1.2@-67.229,33.858 -67.382,33.858 USB1.2@-67.229,33.858
ESW_DBG_B: 1.81 JP4.24 | length 10.7
  Top Layer w0.203: 1.81@54.162,43.245 63.091,43.245 JP4.24@64.361,44.515
ESW_DTEST: 1.76
ESW_P0_LED_0: 1.75 D0.2 | length 4.3
  Top Layer w0.3: 1.75@54.162,35.625 57.241,35.625 57.683,36.068 D0.2@58.293,36.068
ESW_P1_LED_0: 1.74 D1.2 | length 4.2
  Top Layer w0.3: 1.74@54.162,34.355 54.23,34.423 D1.2@58.293,34.423
ESW_P2_LED_0: 1.73 D2.2 | length 4.3
  Top Layer w0.3: 1.73@54.162,33.085 57.987,33.085 D2.2@58.293,32.779
ESW_P3_LED_0: 1.72 D3.1 | length 4.4
  Top Layer w0.3: 1.72@54.162,31.815 56.475,31.815 57.156,31.134 D3.1@58.268,31.134
ESW_P4_LED_0: 1.71 D4.2 | length 4.6
  Top Layer w0.3: 1.71@54.162,30.545 55.662,30.545 56.718,29.489 D4.2@58.293,29.489
ESW_TXVN_A_P0: 1.29 T1.23 | length 25.2
  Top Layer w0.203: T1.23@-9.186,20.613 -9.186,21.188 -9.523,21.525 -9.523,26.969 2.126,38.618 3.709,38.618 1.29@4.162,38.165
ESW_TXVN_A_P1: 1.37 T1.11 | length 10.5
  Top Layer w0.203: T1.11@3.054,20.613 3.054,21.188 2.717,21.525 2.717,22.948 5.636,25.867 7.924,25.867 8.842,26.785 1.37@8.842,27.135
ESW_TXVN_A_P2: 1.46 T2.23 | length 7.3
  Top Layer w0.203: T2.23@19.135,20.613 19.135,21.188 18.798,21.525 18.798,25.211 20.272,26.685 1.46@20.272,27.135
ESW_TXVN_A_P3: 1.55 T2.11 | length 6.9
  Top Layer w0.203: T2.11@31.375,20.613 31.375,21.188 31.038,21.525 31.038,26.047 31.702,26.711 1.55@31.702,27.135
ESW_TXVN_A_P4: 1.64 T3.11 | length 9.6
  Top Layer w0.203: 1.64@43.132,27.135 42.695,26.698 42.695,24.755 43.406,24.044 45.865,24.044 47.114,22.794 47.114,22.02 47.625,21.51 T3.11@47.625,21.19
ESW_TXVN_B_P0: 1.31 T1.20 | length 21.3
  Top Layer w0.203: T1.20@-6.126,20.613 -6.126,21.188 -6.463,21.525 -6.463,27.387 2.228,36.078 3.709,36.078 1.31@4.162,35.625
ESW_TXVN_B_P1: 1.39 T1.8 | length 10.3
  Top Layer w0.203: T1.8@6.114,20.613 6.114,21.188 5.777,21.525 5.777,22.838 8.095,25.156 10.305,25.156 10.924,25.776 10.924,26.678 1.39@11.382,27.135
ESW_TXVN_B_P2: 1.48 T2.20 | length 7.1
  Top Layer w0.203: T2.20@22.195,20.613 22.195,21.188 21.858,21.525 21.858,25.858 22.812,26.812 1.48@22.812,27.135
ESW_TXVN_B_P3: 1.57 T2.8 | length 6.7
  Top Layer w0.203: 1.57@34.242,27.135 34.098,26.991 34.098,21.525 34.435,21.188 T2.8@34.435,20.613
ESW_TXVN_B_P4: 1.66 T3.8 | length 11.6
  Top Layer w0.203: 1.66@45.672,27.135 45.209,26.673 45.209,25.072 45.519,24.762 47.9,24.762 47.937,24.724 50.472,24.724 50.924,24.272 50.924,21.99 51.435,21.48 T3.8@51.435,21.19
ESW_TXVN_C_P0: 1.33 T1.17 | length 17.5
  Top Layer w0.203: T1.17@-3.066,20.613 -3.066,21.188 -3.403,21.525 -3.403,27.856 2.253,33.513 3.734,33.513 1.33@4.162,33.085
ESW_TXVN_C_P1: 1.41 T1.5 | length 10.6
  Top Layer w0.203: T1.5@9.174,20.613 9.174,21.188 8.837,21.525 8.837,23.307 9.975,24.445 11.551,24.445 11.729,24.623 13.306,24.623 13.459,24.777 13.459,26.673 1.41@13.922,27.135
ESW_TXVN_C_P2: 1.50 T2.17 | length 6.8
  Top Layer w0.203: T2.17@25.255,20.613 25.255,21.188 24.918,21.525 24.918,26.701 1.50@25.352,27.135
ESW_TXVN_C_P3: 1.59 T2.5 | length 7.1
  Top Layer w0.203: 1.59@36.782,27.135 36.446,26.8 36.446,26.172 37.158,25.461 37.158,21.525 37.495,21.188 T2.5@37.495,20.613
ESW_TXVN_C_P4: 1.68 T3.5 | length 12
  Top Layer w0.203: 1.68@48.212,27.135 47.749,26.673 47.749,25.918 48.232,25.436 52.956,25.436 54.785,23.607 54.785,21.897 55.245,21.438 T3.5@55.245,21.19
ESW_TXVN_D_P0: 1.35 T1.14 | length 13.6
  Top Layer w0.203: T1.14@-0.006,20.613 -0.006,21.188 -0.343,21.525 -0.343,28.244 2.41,30.998 3.709,30.998 1.35@4.162,30.545
ESW_TXVN_D_P1: 1.43 T1.2 | length 10.6
  Top Layer w0.203: T1.2@12.234,20.613 12.234,21.188 11.897,21.525 11.897,23.771 12.037,23.912 15.542,23.912 15.999,24.369 15.999,26.673 1.43@16.462,27.135
ESW_TXVN_D_P2: 1.52 T2.14 | length 6.7
  Top Layer w0.203: 1.52@27.892,27.135 27.978,27.049 27.978,21.525 28.315,21.188 T2.14@28.315,20.613
ESW_TXVN_D_P3: 1.61 T2.2 | length 7.4
  Top Layer w0.203: 1.61@39.322,27.135 38.859,26.673 38.859,25.893 40.206,24.547 40.206,21.55 40.555,21.201 T2.2@40.555,20.613
ESW_TXVN_D_P4: 1.70 T3.2 | length 12.4
  Top Layer w0.203: 1.70@50.752,27.135 50.752,26.35 50.929,26.172 56.03,26.172 58.57,23.632 58.57,21.939 59.055,21.454 T3.2@59.055,21.19
ESW_TXVP_A_P0: 1.28 T1.24 | length 25.8
  Top Layer w0.203: T1.24@-10.206,20.613 -10.206,21.167 -9.879,21.494 -9.879,27.116 1.979,38.974 3.7,38.974 1.28@4.162,39.435
ESW_TXVP_A_P1: 1.36 T1.12 | length 10
  Top Layer w0.203: T1.12@2.034,20.613 2.034,21.167 2.361,21.494 2.361,23.095 5.489,26.223 7.445,26.223 7.572,26.35 1.36@7.572,27.135
ESW_TXVP_A_P2: 1.45 T2.24 | length 7.2
  Top Layer w0.203: T2.24@18.115,20.613 18.115,21.167 18.442,21.494 18.442,25.364 19.327,26.248 19.327,26.81 1.45@19.002,27.135
ESW_TXVP_A_P3: 1.54 T2.12 | length 6.8
  Top Layer w0.203: T2.12@30.355,20.613 30.355,21.167 30.682,21.494 30.682,26.885 1.54@30.432,27.135
ESW_TXVP_A_P4: 1.63 T3.12 | length 9.6
  Top Layer w0.203: 1.63@41.862,27.135 41.884,27.135 42.339,26.68 42.339,24.537 43.188,23.688 45.718,23.688 46.759,22.647 46.759,21.914 46.355,21.51 T3.12@46.355,21.19
ESW_TXVP_B_P0: 1.30 T1.21 | length 21.9
  Top Layer w0.203: T1.21@-7.146,20.613 -7.146,21.167 -6.819,21.494 -6.819,27.535 2.08,36.434 3.7,36.434 1.30@4.162,36.895
ESW_TXVP_B_P1: 1.38 T1.9 | length 10.3
  Top Layer w0.203: T1.9@5.094,20.613 5.094,21.167 5.421,21.494 5.421,22.985 7.948,25.512 10.157,25.512 10.564,25.918 10.564,26.683 1.38@10.112,27.135
ESW_TXVP_B_P2: 1.47 T2.21 | length 6.7
  Top Layer w0.203: T2.21@21.175,20.613 21.175,21.167 21.502,21.494 21.502,27.095 1.47@21.542,27.135
ESW_TXVP_B_P3: 1.56 T2.9 | length 7
  Top Layer w0.203: 1.56@32.972,27.135 32.972,26.726 33.742,25.956 33.742,21.494 33.415,21.167 T2.9@33.415,20.613
ESW_TXVP_B_P4: 1.65 T3.9 | length 11.5
  Top Layer w0.203: 1.65@44.402,27.135 44.854,26.683 44.854,24.831 45.286,24.399 47.76,24.399 47.79,24.369 50.216,24.369 50.569,24.016 50.569,21.972 50.165,21.568 T3.9@50.165,21.19
ESW_TXVP_C_P0: 1.32 T1.18 | length 18.1
  Top Layer w0.203: T1.18@-4.086,20.613 -4.086,21.167 -3.759,21.494 -3.759,28.004 2.106,33.868 3.675,33.868 1.32@4.162,34.355
ESW_TXVP_C_P1: 1.40 T1.6 | length 10.5
  Top Layer w0.203: T1.6@8.154,20.613 8.154,21.167 8.481,21.494 8.481,23.454 9.827,24.801 11.285,24.801 11.463,24.978 12.921,24.978 13.104,25.161 13.104,26.683 1.40@12.652,27.135
ESW_TXVP_C_P2: 1.49 T2.18 | length 6.9
  Top Layer w0.203: 1.49@24.082,27.135 24.562,26.655 24.562,21.494 24.235,21.167 T2.18@24.235,20.613
ESW_TXVP_C_P3: 1.58 T2.6 | length 7.2
  Top Layer w0.203: 1.58@35.512,27.135 35.512,26.604 36.802,25.314 36.802,21.494 36.475,21.167 T2.6@36.475,20.613
ESW_TXVP_C_P4: 1.67 T3.6 | length 12
  Top Layer w0.203: 1.67@46.942,27.135 47.394,26.683 47.394,25.771 48.085,25.08 52.809,25.08 54.404,23.485 54.404,21.939 53.975,21.51 T3.6@53.975,21.19
ESW_TXVP_D_P0: 1.34 T1.15 | length 14.2
  Top Layer w0.203: T1.15@-1.026,20.613 -1.026,21.167 -0.699,21.494 -0.699,28.392 2.263,31.354 3.7,31.354 1.34@4.162,31.815
ESW_TXVP_D_P1: 1.42 T1.3 | length 10.6
  Top Layer w0.203: T1.3@11.214,20.613 11.214,21.167 11.541,21.494 11.541,23.918 11.89,24.267 15.395,24.267 15.644,24.516 15.644,26.683 1.42@15.192,27.135
ESW_TXVP_D_P2: 1.51 T2.15 | length 7.1
  Top Layer w0.203: 1.51@26.622,27.135 26.622,26.802 27.622,25.802 27.622,21.494 27.295,21.167 T2.15@27.295,20.613
ESW_TXVP_D_P3: 1.60 T2.3 | length 7.4
  Top Layer w0.203: 1.60@38.052,27.135 38.504,26.683 38.504,25.745 39.85,24.399 39.85,21.596 39.535,21.281 T2.3@39.535,20.613
ESW_TXVP_D_P4: 1.69 T3.3 | length 13.3
  Top Layer w0.203: 1.69@49.482,27.135 49.598,27.019 49.598,26.03 49.825,25.804 55.895,25.804 58.214,23.485 58.214,21.981 57.785,21.552 T3.3@57.785,21.19
GE2_RXCLK: 1.91 JP4.14 | length 10.7
  Top Layer w0.203: 1.91@54.162,55.945 63.091,55.945 JP4.14@64.361,57.215
GE2_RXD0: 1.89 JP4.16 | length 10.7
  Top Layer w0.203: 1.89@54.162,53.405 63.091,53.405 JP4.16@64.361,54.675
GE2_RXD1: 1.88 JP4.17 | length 7.7
  Top Layer w0.203: 1.88@54.162,52.135 JP4.17@61.821,52.135
GE2_RXD2: 1.87 JP4.18 | length 10.7
  Top Layer w0.203: 1.87@54.162,50.865 63.091,50.865 JP4.18@64.361,52.135
GE2_RXD3: 1.86 JP4.19 | length 7.7
  Top Layer w0.203: 1.86@54.162,49.595 JP4.19@61.821,49.595
GE2_RXDV: 1.90 JP4.15 | length 7.7
  Top Layer w0.203: 1.90@54.162,54.675 JP4.15@61.821,54.675
GE2_TXCLK: 1.85 JP4.20 | length 10.7
  Top Layer w0.203: 1.85@54.162,48.325 63.091,48.325 JP4.20@64.361,49.595
GE2_TXD0: 1.80 JP4.25 | length 7.7
  Top Layer w0.203: 1.80@54.162,41.975 JP4.25@61.821,41.975
GE2_TXD1: 1.79 JP4.26 | length 10.7
  Top Layer w0.203: 1.79@54.162,40.705 63.091,40.705 JP4.26@64.361,41.975
GE2_TXD2: 1.78 JP4.27 | length 7.7
  Top Layer w0.203: 1.78@54.162,39.435 JP4.27@61.821,39.435
GE2_TXD3: 1.77 JP4.28 | length 10.7
  Top Layer w0.203: 1.77@54.162,38.165 63.091,38.165 JP4.28@64.361,39.435
GE2_TXEN: 1.84 JP4.21 | length 7.7
  Top Layer w0.203: 1.84@54.162,47.055 JP4.21@61.821,47.055